# EAGLE board Bluetooth_Mate_4.0-Panel (EAGLE 9.0.1), part 1 of 2
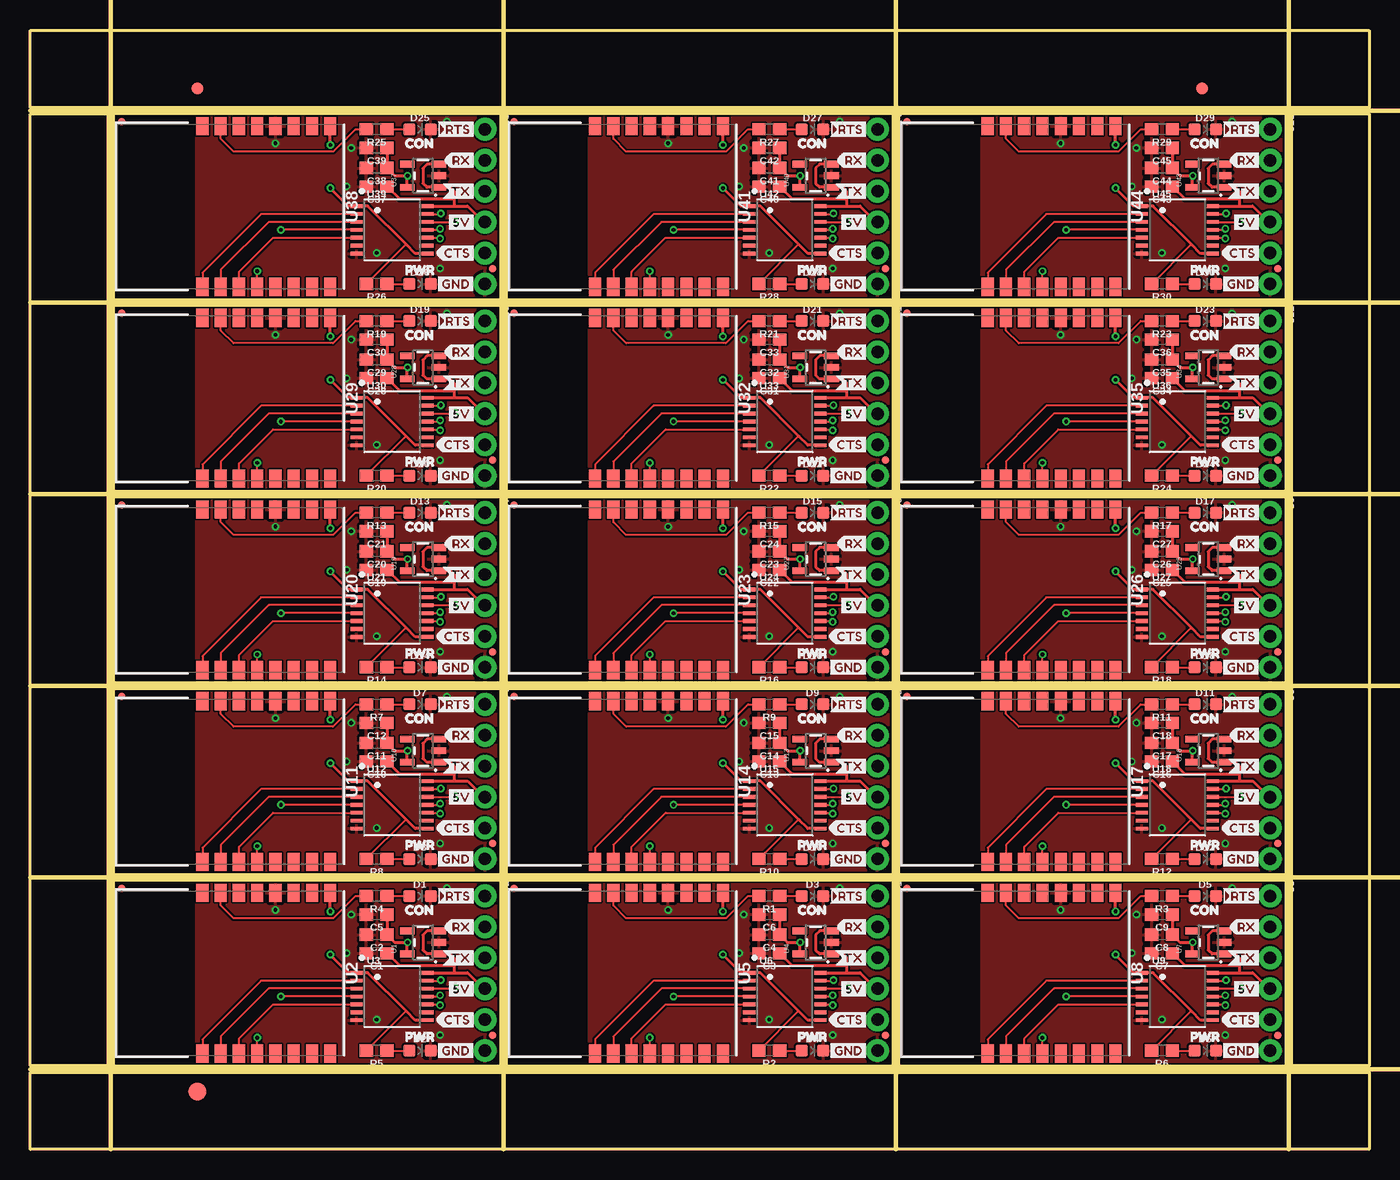
[diagram p0: board, top side]
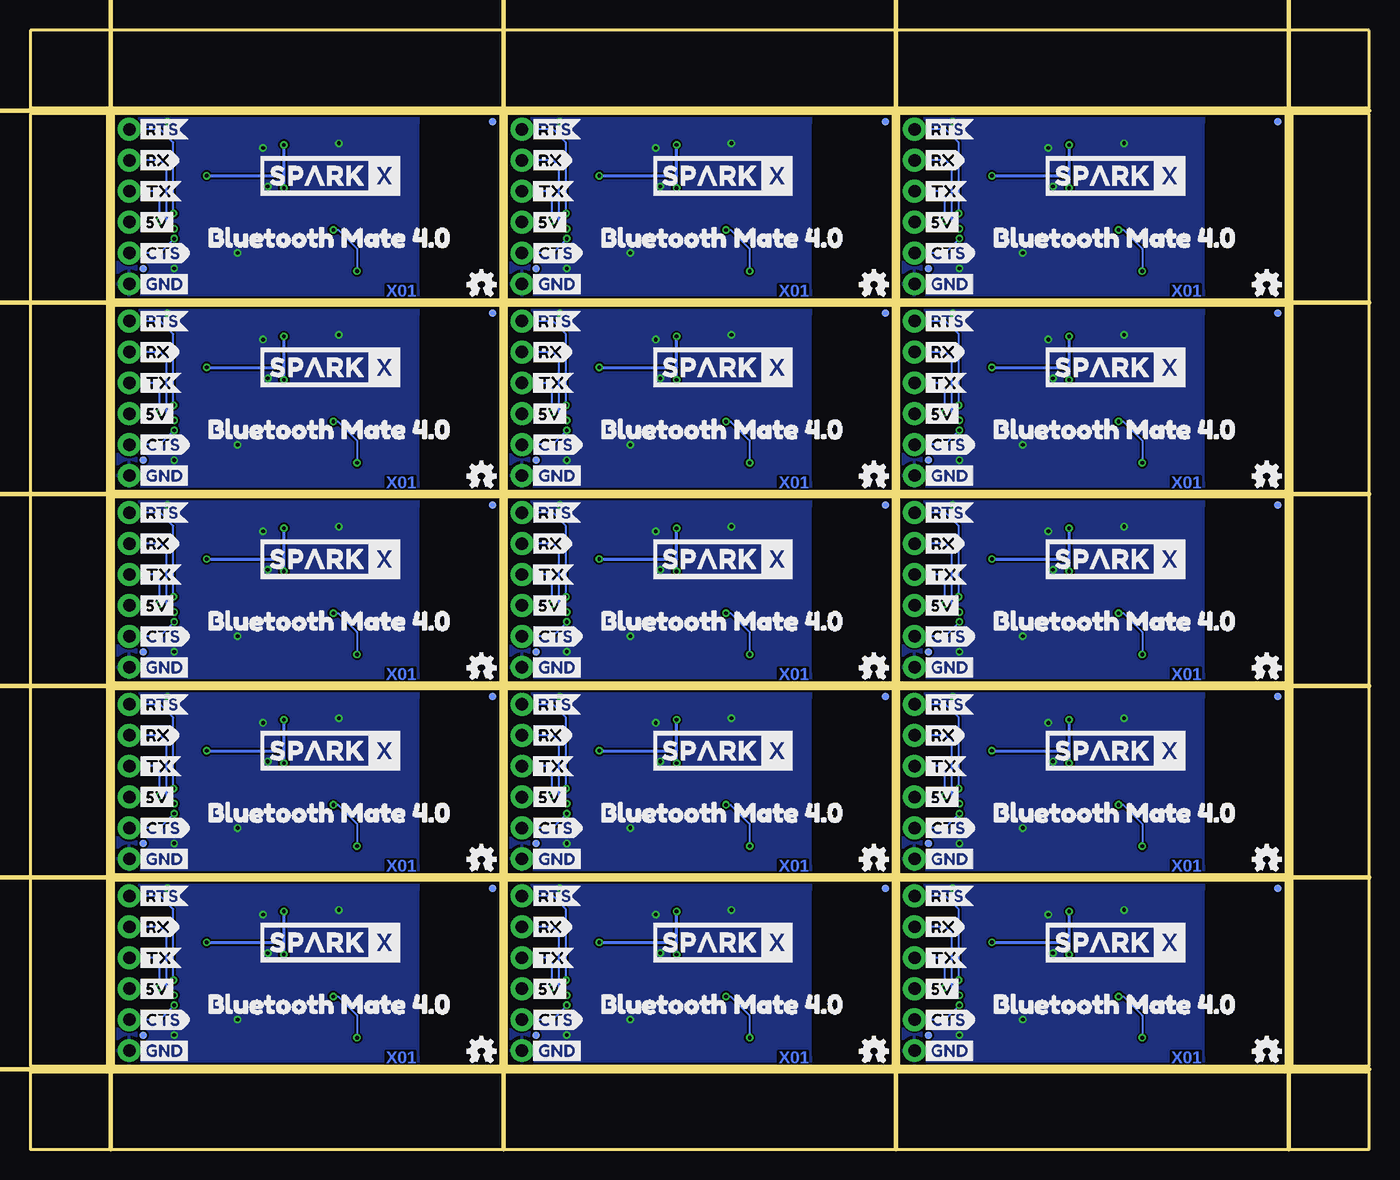
[diagram p1: board, bottom side, seen from below]

Size 109.98 x 91.95 mm. Coordinates in mm from the lower left corner, seen from the top.
Outline: 6.86,6.86 38.61,6.86 38.61,22.1 6.86,22.1 6.86,6.86
Outline: 39.12,6.86 70.87,6.86 70.87,22.1 39.12,22.1 39.12,6.86
Outline: 71.37,6.86 103.12,6.86 103.12,22.1 71.37,22.1 71.37,6.86
Outline: 6.86,22.61 38.61,22.61 38.61,37.85 6.86,37.85 6.86,22.61
Outline: 39.12,22.61 70.87,22.61 70.87,37.85 39.12,37.85 39.12,22.61
Outline: 71.37,22.61 103.12,22.61 103.12,37.85 71.37,37.85 71.37,22.61
Outline: 6.86,38.35 38.61,38.35 38.61,53.59 6.86,53.59 6.86,38.35
Outline: 39.12,38.35 70.87,38.35 70.87,53.59 39.12,53.59 39.12,38.35
Outline: 71.37,38.35 103.12,38.35 103.12,53.59 71.37,53.59 71.37,38.35
Outline: 6.86,54.1 38.61,54.1 38.61,69.34 6.86,69.34 6.86,54.1
Outline: 39.12,54.1 70.87,54.1 70.87,69.34 39.12,69.34 39.12,54.1
Outline: 71.37,54.1 103.12,54.1 103.12,69.34 71.37,69.34 71.37,54.1
Outline: 6.86,69.85 38.61,69.85 38.61,85.09 6.86,85.09 6.86,69.85
Outline: 39.12,69.85 70.87,69.85 70.87,85.09 39.12,85.09 39.12,69.85
Outline: 71.37,69.85 103.12,69.85 103.12,85.09 71.37,85.09 71.37,69.85
Outline: 0,6.35 109.98,6.35 109.98,0 0,0 0,6.35
Outline: 103.63,85.09 109.98,85.09 109.98,6.86 103.63,6.86 103.63,85.09
Outline: 0,91.95 109.98,91.95 109.98,85.6 0,85.6 0,91.95
Outline: 0,85.09 6.35,85.09 6.35,6.86 0,6.86 0,85.09
Copper layers (1*16): Top 0.035mm / dielectric 1.5mm / Bottom 0.035mm
Design rules "SparkFun-2-layer-PCBWay-LIMIT": minimum track width 6mil, minimum drill 0.3mm, track to track 6mil, track to pad 6mil, pad to pad 6mil, via to via 6mil, smd to smd 6mil, copper to edge 6mil, drill to drill 6mil, minimum pad ring 6mil, minimum via ring 6mil, stop-mask expansion 4mil, vias tented up to drill 25mil, thermal gap 10mil
Milling: 10 lines

## Footprints (pad centres in the part's own frame; a part is rotated, then mirrored left to right if it is on the bottom)
0603 = smd 1.1 x 1: 1 -0.85,0; 2 0.85,0
LED-0603 = smd 1 x 1: A -0.877,0; C 0.877,0
FIDUCIAL-1X2 = smd 1 x 1: 1 0,0
FIDUCIAL-1.5X3 = smd 1.5 x 1.5: 1 0,0
FIDUCIAL-MICRO = smd 0.635 x 0.635: 1 0,0
1X06_NO_SILK = drill 1.016 pad 1.88: 1 0,0; 2 2.54,0; 3 5.08,0; 4 7.62,0; 5 10.16,0; 6 12.7,0
SOT23-5 = smd 0.55 x 1.2: 1 -0.95,-1.3; 2 0,-1.3; 3 0.95,-1.3; 4 0.95,1.3; 5 -0.95,1.3
HM-11 = smd 1.5 x 1: 1 -6.6,2.25; 2 -6.6,0.75; 3 -6.6,-0.75; 4 -6.6,-2.25; 5 -6.6,-3.75; 6 -6.6,-5.25; 7 -6.6,-6.75; 8 -6.6,-8.25; 9 6.6,-8.25; 10 6.6,-6.75; 11 6.6,-5.25; 12 6.6,-3.75; 13 6.6,-2.25; 14 6.6,-0.75; 15 6.6,0.75; 16 6.6,2.25
TSSOP14 = smd 0.305 x 0.991: 1 -1.95,-2.918; 2 -1.3,-2.918; 3 -0.65,-2.918; 4 0,-2.918; 5 0.65,-2.918; 6 1.3,-2.918; 7 1.95,-2.918; 8 1.95,2.918; 9 1.3,2.918; 10 0.65,2.918; 11 0,2.918; 12 -0.65,2.918; 13 -1.3,2.918; 14 -1.95,2.918

## Placement (x,y rotation side)
C1  1.0uF  [0603]  28.45,16.13 180 top
C2  0.1uF  [0603]  28.45,17.65 180 top
C3  1.0uF  [0603]  60.71,16.13 180 top
C4  0.1uF  [0603]  60.71,17.65 180 top
C5  1.0uF  [0603]  28.45,19.3 180 top
C6  1.0uF  [0603]  60.71,19.3 180 top
C7  1.0uF  [0603]  92.96,16.13 180 top
C8  0.1uF  [0603]  92.96,17.65 180 top
C9  1.0uF  [0603]  92.96,19.3 180 top
C10  1.0uF  [0603]  28.45,31.88 180 top
C11  0.1uF  [0603]  28.45,33.4 180 top
C12  1.0uF  [0603]  28.45,35.05 180 top
C13  1.0uF  [0603]  60.71,31.88 180 top
C14  0.1uF  [0603]  60.71,33.4 180 top
C15  1.0uF  [0603]  60.71,35.05 180 top
C16  1.0uF  [0603]  92.96,31.88 180 top
C17  0.1uF  [0603]  92.96,33.4 180 top
C18  1.0uF  [0603]  92.96,35.05 180 top
C19  1.0uF  [0603]  28.45,47.62 180 top
C20  0.1uF  [0603]  28.45,49.15 180 top
C21  1.0uF  [0603]  28.45,50.8 180 top
C22  1.0uF  [0603]  60.71,47.62 180 top
C23  0.1uF  [0603]  60.71,49.15 180 top
C24  1.0uF  [0603]  60.71,50.8 180 top
C25  1.0uF  [0603]  92.96,47.62 180 top
C26  0.1uF  [0603]  92.96,49.15 180 top
C27  1.0uF  [0603]  92.96,50.8 180 top
C28  1.0uF  [0603]  28.45,63.37 180 top
C29  0.1uF  [0603]  28.45,64.9 180 top
C30  1.0uF  [0603]  28.45,66.55 180 top
C31  1.0uF  [0603]  60.71,63.37 180 top
C32  0.1uF  [0603]  60.71,64.9 180 top
C33  1.0uF  [0603]  60.71,66.55 180 top
C34  1.0uF  [0603]  92.96,63.37 180 top
C35  0.1uF  [0603]  92.96,64.9 180 top
C36  1.0uF  [0603]  92.96,66.55 180 top
C37  1.0uF  [0603]  28.45,79.12 180 top
C38  0.1uF  [0603]  28.45,80.65 180 top
C39  1.0uF  [0603]  28.45,82.3 180 top
C40  1.0uF  [0603]  60.71,79.12 180 top
C41  0.1uF  [0603]  60.71,80.65 180 top
C42  1.0uF  [0603]  60.71,82.3 180 top
C43  1.0uF  [0603]  92.96,79.12 180 top
C44  0.1uF  [0603]  92.96,80.65 180 top
C45  1.0uF  [0603]  92.96,82.3 180 top
D1  GREEN  [LED-0603]  32,20.83 0 top
D2  RED  [LED-0603]  32,8.13 0 top
D3  GREEN  [LED-0603]  64.26,20.83 0 top
D4  RED  [LED-0603]  64.26,8.13 0 top
D5  GREEN  [LED-0603]  96.52,20.83 0 top
D6  RED  [LED-0603]  96.52,8.13 0 top
D7  GREEN  [LED-0603]  32,36.58 0 top
D8  RED  [LED-0603]  32,23.88 0 top
D9  GREEN  [LED-0603]  64.26,36.58 0 top
D10  RED  [LED-0603]  64.26,23.88 0 top
D11  GREEN  [LED-0603]  96.52,36.58 0 top
D12  RED  [LED-0603]  96.52,23.88 0 top
D13  GREEN  [LED-0603]  32,52.32 0 top
D14  RED  [LED-0603]  32,39.62 0 top
D15  GREEN  [LED-0603]  64.26,52.32 0 top
D16  RED  [LED-0603]  64.26,39.62 0 top
D17  GREEN  [LED-0603]  96.52,52.32 0 top
D18  RED  [LED-0603]  96.52,39.62 0 top
D19  GREEN  [LED-0603]  32,68.07 0 top
D20  RED  [LED-0603]  32,55.37 0 top
D21  GREEN  [LED-0603]  64.26,68.07 0 top
D22  RED  [LED-0603]  64.26,55.37 0 top
D23  GREEN  [LED-0603]  96.52,68.07 0 top
D24  RED  [LED-0603]  96.52,55.37 0 top
D25  GREEN  [LED-0603]  32,83.82 0 top
D26  RED  [LED-0603]  32,71.12 0 top
D27  GREEN  [LED-0603]  64.26,83.82 0 top
D28  RED  [LED-0603]  64.26,71.12 0 top
D29  GREEN  [LED-0603]  96.52,83.82 0 top
D30  RED  [LED-0603]  96.52,71.12 0 top
E$1  [FIDUCIAL-1X2]  13.72,87.19 0 top
E$2  [FIDUCIAL-1X2]  96.27,87.19 0 top
E$3  [FIDUCIAL-1.5X3]  13.72,4.76 0 top
FD1  FIDUCIALUFIDUCIAL  [FIDUCIAL-MICRO]  7.49,21.46 0 top
FD2  FIDUCIALUFIDUCIAL  [FIDUCIAL-MICRO]  37.97,9.4 0 top
FD3  FIDUCIALUFIDUCIAL  [FIDUCIAL-MICRO]  36.2,9.4 0 bottom
FD4  FIDUCIALUFIDUCIAL  [FIDUCIAL-MICRO]  7.49,21.46 0 bottom
FD5  FIDUCIALUFIDUCIAL  [FIDUCIAL-MICRO]  39.75,21.46 0 top
FD6  FIDUCIALUFIDUCIAL  [FIDUCIAL-MICRO]  70.23,9.4 0 top
FD7  FIDUCIALUFIDUCIAL  [FIDUCIAL-MICRO]  68.45,9.4 0 bottom
FD8  FIDUCIALUFIDUCIAL  [FIDUCIAL-MICRO]  39.75,21.46 0 bottom
FD9  FIDUCIALUFIDUCIAL  [FIDUCIAL-MICRO]  72.01,21.46 0 top
FD10  FIDUCIALUFIDUCIAL  [FIDUCIAL-MICRO]  102.49,9.4 0 top
FD11  FIDUCIALUFIDUCIAL  [FIDUCIAL-MICRO]  100.71,9.4 0 bottom
FD12  FIDUCIALUFIDUCIAL  [FIDUCIAL-MICRO]  72.01,21.46 0 bottom
FD13  FIDUCIALUFIDUCIAL  [FIDUCIAL-MICRO]  7.49,37.21 0 top
FD14  FIDUCIALUFIDUCIAL  [FIDUCIAL-MICRO]  37.97,25.15 0 top
FD15  FIDUCIALUFIDUCIAL  [FIDUCIAL-MICRO]  36.2,25.15 0 bottom
FD16  FIDUCIALUFIDUCIAL  [FIDUCIAL-MICRO]  7.49,37.21 0 bottom
FD17  FIDUCIALUFIDUCIAL  [FIDUCIAL-MICRO]  39.75,37.21 0 top
FD18  FIDUCIALUFIDUCIAL  [FIDUCIAL-MICRO]  70.23,25.15 0 top
FD19  FIDUCIALUFIDUCIAL  [FIDUCIAL-MICRO]  68.45,25.15 0 bottom
FD20  FIDUCIALUFIDUCIAL  [FIDUCIAL-MICRO]  39.75,37.21 0 bottom
FD21  FIDUCIALUFIDUCIAL  [FIDUCIAL-MICRO]  72.01,37.21 0 top
FD22  FIDUCIALUFIDUCIAL  [FIDUCIAL-MICRO]  102.49,25.15 0 top
FD23  FIDUCIALUFIDUCIAL  [FIDUCIAL-MICRO]  100.71,25.15 0 bottom
FD24  FIDUCIALUFIDUCIAL  [FIDUCIAL-MICRO]  72.01,37.21 0 bottom
FD25  FIDUCIALUFIDUCIAL  [FIDUCIAL-MICRO]  7.49,52.96 0 top
FD26  FIDUCIALUFIDUCIAL  [FIDUCIAL-MICRO]  37.97,40.89 0 top
FD27  FIDUCIALUFIDUCIAL  [FIDUCIAL-MICRO]  36.2,40.89 0 bottom
FD28  FIDUCIALUFIDUCIAL  [FIDUCIAL-MICRO]  7.49,52.96 0 bottom
FD29  FIDUCIALUFIDUCIAL  [FIDUCIAL-MICRO]  39.75,52.96 0 top
FD30  FIDUCIALUFIDUCIAL  [FIDUCIAL-MICRO]  70.23,40.89 0 top
FD31  FIDUCIALUFIDUCIAL  [FIDUCIAL-MICRO]  68.45,40.89 0 bottom
FD32  FIDUCIALUFIDUCIAL  [FIDUCIAL-MICRO]  39.75,52.96 0 bottom
FD33  FIDUCIALUFIDUCIAL  [FIDUCIAL-MICRO]  72.01,52.96 0 top
FD34  FIDUCIALUFIDUCIAL  [FIDUCIAL-MICRO]  102.49,40.89 0 top
FD35  FIDUCIALUFIDUCIAL  [FIDUCIAL-MICRO]  100.71,40.89 0 bottom
FD36  FIDUCIALUFIDUCIAL  [FIDUCIAL-MICRO]  72.01,52.96 0 bottom
FD37  FIDUCIALUFIDUCIAL  [FIDUCIAL-MICRO]  7.49,68.71 0 top
FD38  FIDUCIALUFIDUCIAL  [FIDUCIAL-MICRO]  37.97,56.64 0 top
FD39  FIDUCIALUFIDUCIAL  [FIDUCIAL-MICRO]  36.2,56.64 0 bottom
FD40  FIDUCIALUFIDUCIAL  [FIDUCIAL-MICRO]  7.49,68.71 0 bottom
FD41  FIDUCIALUFIDUCIAL  [FIDUCIAL-MICRO]  39.75,68.71 0 top
FD42  FIDUCIALUFIDUCIAL  [FIDUCIAL-MICRO]  70.23,56.64 0 top
FD43  FIDUCIALUFIDUCIAL  [FIDUCIAL-MICRO]  68.45,56.64 0 bottom
FD44  FIDUCIALUFIDUCIAL  [FIDUCIAL-MICRO]  39.75,68.71 0 bottom
FD45  FIDUCIALUFIDUCIAL  [FIDUCIAL-MICRO]  72.01,68.71 0 top
FD46  FIDUCIALUFIDUCIAL  [FIDUCIAL-MICRO]  102.49,56.64 0 top
FD47  FIDUCIALUFIDUCIAL  [FIDUCIAL-MICRO]  100.71,56.64 0 bottom
FD48  FIDUCIALUFIDUCIAL  [FIDUCIAL-MICRO]  72.01,68.71 0 bottom
FD49  FIDUCIALUFIDUCIAL  [FIDUCIAL-MICRO]  7.49,84.45 0 top
FD50  FIDUCIALUFIDUCIAL  [FIDUCIAL-MICRO]  37.97,72.39 0 top
FD51  FIDUCIALUFIDUCIAL  [FIDUCIAL-MICRO]  36.2,72.39 0 bottom
FD52  FIDUCIALUFIDUCIAL  [FIDUCIAL-MICRO]  7.49,84.45 0 bottom
FD53  FIDUCIALUFIDUCIAL  [FIDUCIAL-MICRO]  39.75,84.45 0 top
FD54  FIDUCIALUFIDUCIAL  [FIDUCIAL-MICRO]  70.23,72.39 0 top
FD55  FIDUCIALUFIDUCIAL  [FIDUCIAL-MICRO]  68.45,72.39 0 bottom
FD56  FIDUCIALUFIDUCIAL  [FIDUCIAL-MICRO]  39.75,84.45 0 bottom
FD57  FIDUCIALUFIDUCIAL  [FIDUCIAL-MICRO]  72.01,84.45 0 top
FD58  FIDUCIALUFIDUCIAL  [FIDUCIAL-MICRO]  102.49,72.39 0 top
FD59  FIDUCIALUFIDUCIAL  [FIDUCIAL-MICRO]  100.71,72.39 0 bottom
FD60  FIDUCIALUFIDUCIAL  [FIDUCIAL-MICRO]  72.01,84.45 0 bottom
J1  [1X06_NO_SILK]  69.6,20.83 270 top
J2  [1X06_NO_SILK]  37.34,20.83 270 top
J3  [1X06_NO_SILK]  101.85,20.83 270 top
J4  [1X06_NO_SILK]  37.34,36.58 270 top
J5  [1X06_NO_SILK]  69.6,36.58 270 top
J6  [1X06_NO_SILK]  101.85,36.58 270 top
J7  [1X06_NO_SILK]  37.34,52.32 270 top
J8  [1X06_NO_SILK]  69.6,52.32 270 top
J9  [1X06_NO_SILK]  101.85,52.32 270 top
J10  [1X06_NO_SILK]  37.34,68.07 270 top
J11  [1X06_NO_SILK]  69.6,68.07 270 top
J12  [1X06_NO_SILK]  101.85,68.07 270 top
J13  [1X06_NO_SILK]  37.34,83.82 270 top
J14  [1X06_NO_SILK]  69.6,83.82 270 top
J15  [1X06_NO_SILK]  101.85,83.82 270 top
LOGO1  OSHW-LOGOMINI  [OSHW-LOGO-MINI]  8.41,8.1 0 bottom
LOGO2  OSHW-LOGOMINI  [OSHW-LOGO-MINI]  40.67,8.1 0 bottom
LOGO3  SPARKX-LOGO5  [SPARKX-LARGE]  20.83,17.02 0 bottom
LOGO4  SPARKX-LOGO5  [SPARKX-LARGE]  53.09,17.02 0 bottom
LOGO5  OSHW-LOGOMINI  [OSHW-LOGO-MINI]  72.93,8.1 0 bottom
LOGO6  SPARKX-LOGO5  [SPARKX-LARGE]  85.34,17.02 0 bottom
LOGO7  OSHW-LOGOMINI  [OSHW-LOGO-MINI]  8.41,23.84 0 bottom
LOGO8  SPARKX-LOGO5  [SPARKX-LARGE]  20.83,32.77 0 bottom
LOGO9  OSHW-LOGOMINI  [OSHW-LOGO-MINI]  40.67,23.84 0 bottom
LOGO10  SPARKX-LOGO5  [SPARKX-LARGE]  53.09,32.77 0 bottom
LOGO11  OSHW-LOGOMINI  [OSHW-LOGO-MINI]  72.93,23.84 0 bottom
LOGO12  SPARKX-LOGO5  [SPARKX-LARGE]  85.34,32.77 0 bottom
LOGO13  OSHW-LOGOMINI  [OSHW-LOGO-MINI]  8.41,39.59 0 bottom
LOGO14  SPARKX-LOGO5  [SPARKX-LARGE]  20.83,48.51 0 bottom
LOGO15  OSHW-LOGOMINI  [OSHW-LOGO-MINI]  40.67,39.59 0 bottom
LOGO16  SPARKX-LOGO5  [SPARKX-LARGE]  53.09,48.51 0 bottom
LOGO17  OSHW-LOGOMINI  [OSHW-LOGO-MINI]  72.93,39.59 0 bottom
LOGO18  SPARKX-LOGO5  [SPARKX-LARGE]  85.34,48.51 0 bottom
LOGO19  OSHW-LOGOMINI  [OSHW-LOGO-MINI]  8.41,55.34 0 bottom
LOGO20  SPARKX-LOGO5  [SPARKX-LARGE]  20.83,64.26 0 bottom
LOGO21  OSHW-LOGOMINI  [OSHW-LOGO-MINI]  40.67,55.34 0 bottom
LOGO22  SPARKX-LOGO5  [SPARKX-LARGE]  53.09,64.26 0 bottom
LOGO23  OSHW-LOGOMINI  [OSHW-LOGO-MINI]  72.93,55.34 0 bottom
LOGO24  SPARKX-LOGO5  [SPARKX-LARGE]  85.34,64.26 0 bottom
LOGO25  OSHW-LOGOMINI  [OSHW-LOGO-MINI]  8.41,71.09 0 bottom
LOGO26  SPARKX-LOGO5  [SPARKX-LARGE]  20.83,80.01 0 bottom
LOGO27  OSHW-LOGOMINI  [OSHW-LOGO-MINI]  40.67,71.09 0 bottom
LOGO28  SPARKX-LOGO5  [SPARKX-LARGE]  53.09,80.01 0 bottom
LOGO29  OSHW-LOGOMINI  [OSHW-LOGO-MINI]  72.93,71.09 0 bottom
LOGO30  SPARKX-LOGO5  [SPARKX-LARGE]  85.34,80.01 0 bottom
R1  330  [0603]  60.71,20.83 180 top
R2  1k  [0603]  60.71,8.13 180 top
R3  330  [0603]  92.96,20.83 180 top
R4  330  [0603]  28.45,20.83 180 top
R5  1k  [0603]  28.45,8.13 180 top
R6  1k  [0603]  92.96,8.13 180 top
R7  330  [0603]  28.45,36.58 180 top
R8  1k  [0603]  28.45,23.88 180 top
R9  330  [0603]  60.71,36.58 180 top
R10  1k  [0603]  60.71,23.88 180 top
R11  330  [0603]  92.96,36.58 180 top
R12  1k  [0603]  92.96,23.88 180 top
R13  330  [0603]  28.45,52.32 180 top
R14  1k  [0603]  28.45,39.62 180 top
R15  330  [0603]  60.71,52.32 180 top
R16  1k  [0603]  60.71,39.62 180 top
R17  330  [0603]  92.96,52.32 180 top
R18  1k  [0603]  92.96,39.62 180 top
R19  330  [0603]  28.45,68.07 180 top
R20  1k  [0603]  28.45,55.37 180 top
R21  330  [0603]  60.71,68.07 180 top
R22  1k  [0603]  60.71,55.37 180 top
R23  330  [0603]  92.96,68.07 180 top
R24  1k  [0603]  92.96,55.37 180 top
R25  330  [0603]  28.45,83.82 180 top
R26  1k  [0603]  28.45,71.12 180 top
R27  330  [0603]  60.71,83.82 180 top
R28  1k  [0603]  60.71,71.12 180 top
R29  330  [0603]  92.96,83.82 180 top
R30  1k  [0603]  92.96,71.12 180 top
U1  3.3V  [SOT23-5]  32.26,17.02 90 top
U2  HM-17  [HM-11]  16.38,14.48 90 top
U3  TXB0104  [TSSOP14]  29.72,12.57 270 top
U4  3.3V  [SOT23-5]  64.52,17.02 90 top
U5  HM-17  [HM-11]  48.64,14.48 90 top
U6  TXB0104  [TSSOP14]  61.98,12.57 270 top
U7  3.3V  [SOT23-5]  96.77,17.02 90 top
U8  HM-17  [HM-11]  80.9,14.48 90 top
U9  TXB0104  [TSSOP14]  94.23,12.57 270 top
U10  3.3V  [SOT23-5]  32.26,32.77 90 top
U11  HM-17  [HM-11]  16.38,30.23 90 top
U12  TXB0104  [TSSOP14]  29.72,28.32 270 top
U13  3.3V  [SOT23-5]  64.52,32.77 90 top
U14  HM-17  [HM-11]  48.64,30.23 90 top
U15  TXB0104  [TSSOP14]  61.98,28.32 270 top
U16  3.3V  [SOT23-5]  96.77,32.77 90 top
U17  HM-17  [HM-11]  80.9,30.23 90 top
U18  TXB0104  [TSSOP14]  94.23,28.32 270 top
U19  3.3V  [SOT23-5]  32.26,48.51 90 top
U20  HM-17  [HM-11]  16.38,45.97 90 top
U21  TXB0104  [TSSOP14]  29.72,44.07 270 top
U22  3.3V  [SOT23-5]  64.52,48.51 90 top
U23  HM-17  [HM-11]  48.64,45.97 90 top
U24  TXB0104  [TSSOP14]  61.98,44.07 270 top
U25  3.3V  [SOT23-5]  96.77,48.51 90 top
U26  HM-17  [HM-11]  80.9,45.97 90 top
U27  TXB0104  [TSSOP14]  94.23,44.07 270 top
U28  3.3V  [SOT23-5]  32.26,64.26 90 top
U29  HM-17  [HM-11]  16.38,61.72 90 top
U30  TXB0104  [TSSOP14]  29.72,59.82 270 top
U31  3.3V  [SOT23-5]  64.52,64.26 90 top
U32  HM-17  [HM-11]  48.64,61.72 90 top
U33  TXB0104  [TSSOP14]  61.98,59.82 270 top
U34  3.3V  [SOT23-5]  96.77,64.26 90 top
U35  HM-17  [HM-11]  80.9,61.72 90 top
U36  TXB0104  [TSSOP14]  94.23,59.82 270 top
U37  3.3V  [SOT23-5]  32.26,80.01 90 top
U38  HM-17  [HM-11]  16.38,77.47 90 top
U39  TXB0104  [TSSOP14]  29.72,75.56 270 top
U40  3.3V  [SOT23-5]  64.52,80.01 90 top
U41  HM-17  [HM-11]  48.64,77.47 90 top
U42  TXB0104  [TSSOP14]  61.98,75.56 270 top
U43  3.3V  [SOT23-5]  96.77,80.01 90 top
U44  HM-17  [HM-11]  80.9,77.47 90 top
U45  TXB0104  [TSSOP14]  94.23,75.56 270 top
U$1  [CTS13]  33.27,10.67 0 top
U$2  [5V9]  34,13.21 0 top
U$3  [GND8]  33.12,8.13 0 top
U$4  [RX10]  33.94,18.29 0 top
U$5  [TX9]  33.85,15.75 0 top
U$6  [RTS12]  33.4,20.83 0 top
U$7  [RTS13]  36.93,20.83 0 bottom
U$8  [TX11]  36.89,15.75 0 bottom
U$9  [RX9]  36.93,18.29 0 bottom
U$10  [5V6]  36.93,13.21 0 bottom
U$11  [CTS8]  36.93,10.67 0 bottom
U$12  [GND13]  36.89,8.13 0 bottom
U$13  [BLUETOOTH_MATE_4#06]  32.26,11.94 0 bottom
U$14  [PWR6]  30.1,9.27 0 top
U$15  [CON7]  30.1,19.68 0 top
U$16  [BLUETOOTH_MATE_4#06]  64.52,11.94 0 bottom
U$17  [PWR6]  62.36,9.27 0 top
U$18  [CON7]  62.36,19.68 0 top
U$19  [5V9]  66.26,13.21 0 top
U$20  [CTS13]  65.53,10.67 0 top
U$21  [GND8]  65.37,8.13 0 top
U$22  [RX10]  66.2,18.29 0 top
U$23  [RTS12]  65.66,20.83 0 top
U$24  [RTS13]  69.18,20.83 0 bottom
U$25  [TX11]  69.15,15.75 0 bottom
U$26  [RX9]  69.18,18.29 0 bottom
U$27  [5V6]  69.18,13.21 0 bottom
U$28  [CTS8]  69.18,10.67 0 bottom
U$29  [GND13]  69.15,8.13 0 bottom
U$30  [TX9]  66.1,15.75 0 top
U$31  [BLUETOOTH_MATE_4#06]  96.77,11.94 0 bottom
U$32  [PWR6]  94.62,9.27 0 top
U$33  [CON7]  94.62,19.68 0 top
U$34  [5V9]  98.52,13.21 0 top
U$35  [CTS13]  97.79,10.67 0 top
U$36  [GND8]  97.63,8.13 0 top
U$37  [RX10]  98.46,18.29 0 top
U$38  [RTS12]  97.92,20.83 0 top
U$39  [RTS13]  101.44,20.83 0 bottom
U$40  [TX11]  101.41,15.75 0 bottom
U$41  [RX9]  101.44,18.29 0 bottom
U$42  [5V6]  101.44,13.21 0 bottom
U$43  [CTS8]  101.44,10.67 0 bottom
U$44  [GND13]  101.41,8.13 0 bottom
U$45  [TX9]  98.36,15.75 0 top
U$46  [BLUETOOTH_MATE_4#06]  32.26,27.69 0 bottom
U$47  [PWR6]  30.1,25.02 0 top
U$48  [CON7]  30.1,35.43 0 top
U$49  [5V9]  34,28.96 0 top
U$50  [CTS13]  33.27,26.42 0 top
U$51  [GND8]  33.12,23.88 0 top
U$52  [RX10]  33.94,34.04 0 top
U$53  [RTS12]  33.4,36.58 0 top
U$54  [RTS13]  36.93,36.58 0 bottom
U$55  [TX11]  36.89,31.5 0 bottom
U$56  [RX9]  36.93,34.04 0 bottom
U$57  [5V6]  36.93,28.96 0 bottom
U$58  [CTS8]  36.93,26.42 0 bottom
U$59  [GND13]  36.89,23.88 0 bottom
U$60  [TX9]  33.85,31.5 0 top
U$61  [BLUETOOTH_MATE_4#06]  64.52,27.69 0 bottom
U$62  [PWR6]  62.36,25.02 0 top
U$63  [CON7]  62.36,35.43 0 top
U$64  [5V9]  66.26,28.96 0 top
U$65  [CTS13]  65.53,26.42 0 top
U$66  [GND8]  65.37,23.88 0 top
U$67  [RX10]  66.2,34.04 0 top
U$68  [RTS12]  65.66,36.58 0 top
U$69  [RTS13]  69.18,36.58 0 bottom
U$70  [TX11]  69.15,31.5 0 bottom
U$71  [RX9]  69.18,34.04 0 bottom
U$72  [5V6]  69.18,28.96 0 bottom
U$73  [CTS8]  69.18,26.42 0 bottom
U$74  [GND13]  69.15,23.88 0 bottom
U$75  [TX9]  66.1,31.5 0 top
U$76  [BLUETOOTH_MATE_4#06]  96.77,27.69 0 bottom
U$77  [PWR6]  94.62,25.02 0 top
U$78  [CON7]  94.62,35.43 0 top
U$79  [5V9]  98.52,28.96 0 top
U$80  [CTS13]  97.79,26.42 0 top
U$81  [GND8]  97.63,23.88 0 top
U$82  [RX10]  98.46,34.04 0 top
U$83  [RTS12]  97.92,36.58 0 top
U$84  [RTS13]  101.44,36.58 0 bottom
U$85  [TX11]  101.41,31.5 0 bottom
U$86  [RX9]  101.44,34.04 0 bottom
U$87  [5V6]  101.44,28.96 0 bottom
U$88  [CTS8]  101.44,26.42 0 bottom
U$89  [GND13]  101.41,23.88 0 bottom
U$90  [TX9]  98.36,31.5 0 top
U$91  [BLUETOOTH_MATE_4#06]  32.26,43.43 0 bottom
U$92  [PWR6]  30.1,40.77 0 top
U$93  [CON7]  30.1,51.18 0 top
U$94  [5V9]  34,44.7 0 top
U$95  [CTS13]  33.27,42.16 0 top
U$96  [GND8]  33.12,39.62 0 top
U$97  [RX10]  33.94,49.78 0 top
U$98  [RTS12]  33.4,52.32 0 top
U$99  [RTS13]  36.93,52.32 0 bottom
U$100  [TX11]  36.89,47.24 0 bottom
U$101  [RX9]  36.93,49.78 0 bottom
U$102  [5V6]  36.93,44.7 0 bottom
U$103  [CTS8]  36.93,42.16 0 bottom
U$104  [GND13]  36.89,39.62 0 bottom
U$105  [TX9]  33.85,47.24 0 top
U$106  [BLUETOOTH_MATE_4#06]  64.52,43.43 0 bottom
U$107  [PWR6]  62.36,40.77 0 top
U$108  [CON7]  62.36,51.18 0 top
U$109  [5V9]  66.26,44.7 0 top
U$110  [CTS13]  65.53,42.16 0 top
U$111  [GND8]  65.37,39.62 0 top
U$112  [RX10]  66.2,49.78 0 top
U$113  [RTS12]  65.66,52.32 0 top
U$114  [RTS13]  69.18,52.32 0 bottom
U$115  [TX11]  69.15,47.24 0 bottom
U$116  [RX9]  69.18,49.78 0 bottom
U$117  [5V6]  69.18,44.7 0 bottom
U$118  [CTS8]  69.18,42.16 0 bottom
U$119  [GND13]  69.15,39.62 0 bottom
U$120  [TX9]  66.1,47.24 0 top
U$121  [BLUETOOTH_MATE_4#06]  96.77,43.43 0 bottom
U$122  [PWR6]  94.62,40.77 0 top
U$123  [CON7]  94.62,51.18 0 top
U$124  [5V9]  98.52,44.7 0 top
U$125  [CTS13]  97.79,42.16 0 top
U$126  [GND8]  97.63,39.62 0 top
U$127  [RX10]  98.46,49.78 0 top
U$128  [RTS12]  97.92,52.32 0 top
U$129  [RTS13]  101.44,52.32 0 bottom
U$130  [TX11]  101.41,47.24 0 bottom
U$131  [RX9]  101.44,49.78 0 bottom
U$132  [5V6]  101.44,44.7 0 bottom
U$133  [CTS8]  101.44,42.16 0 bottom
U$134  [GND13]  101.41,39.62 0 bottom
U$135  [TX9]  98.36,47.24 0 top
U$136  [BLUETOOTH_MATE_4#06]  32.26,59.18 0 bottom
U$137  [PWR6]  30.1,56.51 0 top
U$138  [CON7]  30.1,66.93 0 top
U$139  [5V9]  34,60.45 0 top
U$140  [CTS13]  33.27,57.91 0 top
U$141  [GND8]  33.12,55.37 0 top
U$142  [RX10]  33.94,65.53 0 top
U$143  [RTS12]  33.4,68.07 0 top
U$144  [RTS13]  36.93,68.07 0 bottom
U$145  [TX11]  36.89,62.99 0 bottom
U$146  [RX9]  36.93,65.53 0 bottom
U$147  [5V6]  36.93,60.45 0 bottom
U$148  [CTS8]  36.93,57.91 0 bottom
U$149  [GND13]  36.89,55.37 0 bottom
U$150  [TX9]  33.85,62.99 0 top
U$151  [BLUETOOTH_MATE_4#06]  64.52,59.18 0 bottom
U$152  [PWR6]  62.36,56.51 0 top
U$153  [CON7]  62.36,66.93 0 top
U$154  [5V9]  66.26,60.45 0 top
U$155  [CTS13]  65.53,57.91 0 top
U$156  [GND8]  65.37,55.37 0 top
U$157  [RX10]  66.2,65.53 0 top
U$158  [RTS12]  65.66,68.07 0 top
U$159  [RTS13]  69.18,68.07 0 bottom
U$160  [TX11]  69.15,62.99 0 bottom
U$161  [RX9]  69.18,65.53 0 bottom
U$162  [5V6]  69.18,60.45 0 bottom
U$163  [CTS8]  69.18,57.91 0 bottom
U$164  [GND13]  69.15,55.37 0 bottom
U$165  [TX9]  66.1,62.99 0 top
U$166  [BLUETOOTH_MATE_4#06]  96.77,59.18 0 bottom
U$167  [PWR6]  94.62,56.51 0 top
U$168  [CON7]  94.62,66.93 0 top
U$169  [5V9]  98.52,60.45 0 top
U$170  [CTS13]  97.79,57.91 0 top
U$171  [GND8]  97.63,55.37 0 top
U$172  [RX10]  98.46,65.53 0 top
U$173  [RTS12]  97.92,68.07 0 top
U$174  [RTS13]  101.44,68.07 0 bottom
U$175  [TX11]  101.41,62.99 0 bottom
U$176  [RX9]  101.44,65.53 0 bottom
U$177  [5V6]  101.44,60.45 0 bottom
U$178  [CTS8]  101.44,57.91 0 bottom
U$179  [GND13]  101.41,55.37 0 bottom
U$180  [TX9]  98.36,62.99 0 top
U$181  [BLUETOOTH_MATE_4#06]  32.26,74.93 0 bottom
U$182  [PWR6]  30.1,72.26 0 top
U$183  [CON7]  30.1,82.68 0 top
U$184  [5V9]  34,76.2 0 top
U$185  [CTS13]  33.27,73.66 0 top
U$186  [GND8]  33.12,71.12 0 top
U$187  [RX10]  33.94,81.28 0 top
U$188  [RTS12]  33.4,83.82 0 top
U$189  [RTS13]  36.93,83.82 0 bottom
U$190  [TX11]  36.89,78.74 0 bottom
U$191  [RX9]  36.93,81.28 0 bottom
U$192  [5V6]  36.93,76.2 0 bottom
U$193  [CTS8]  36.93,73.66 0 bottom
U$194  [GND13]  36.89,71.12 0 bottom
U$195  [TX9]  33.85,78.74 0 top
U$196  [BLUETOOTH_MATE_4#06]  64.52,74.93 0 bottom
U$197  [PWR6]  62.36,72.26 0 top
U$198  [CON7]  62.36,82.68 0 top
U$199  [5V9]  66.26,76.2 0 top
U$200  [CTS13]  65.53,73.66 0 top
U$201  [GND8]  65.37,71.12 0 top
U$202  [RX10]  66.2,81.28 0 top
U$203  [RTS12]  65.66,83.82 0 top
U$204  [RTS13]  69.18,83.82 0 bottom
U$205  [TX11]  69.15,78.74 0 bottom
U$206  [RX9]  69.18,81.28 0 bottom
U$207  [5V6]  69.18,76.2 0 bottom
U$208  [CTS8]  69.18,73.66 0 bottom
U$209  [GND13]  69.15,71.12 0 bottom
U$210  [TX9]  66.1,78.74 0 top
U$211  [BLUETOOTH_MATE_4#06]  96.77,74.93 0 bottom
U$212  [PWR6]  94.62,72.26 0 top
U$213  [CON7]  94.62,82.68 0 top
U$214  [5V9]  98.52,76.2 0 top
U$215  [CTS13]  97.79,73.66 0 top
U$216  [GND8]  97.63,71.12 0 top
U$217  [RX10]  98.46,81.28 0 top
U$218  [RTS12]  97.92,83.82 0 top
U$219  [RTS13]  101.44,83.82 0 bottom
U$220  [TX11]  101.41,78.74 0 bottom
U$221  [RX9]  101.44,81.28 0 bottom
U$222  [5V6]  101.44,76.2 0 bottom
U$223  [CTS8]  101.44,73.66 0 bottom
U$224  [GND13]  101.41,71.12 0 bottom
U$225  [TX9]  98.36,78.74 0 top

## Library data of the parts
C1 C3 C5-C7 C9 C10 C12 C13 C15 C16 C18 C19 C21 C22 C24 C25 C27 C28 C30 C31 C33 C34 C36 C37 C39 C40 C42 C43 C45 = SparkFun-Capacitors; PROD_ID: CAP-00868
C2 C4 C8 C11 C14 C17 C20 C23 C26 C29 C32 C35 C38 C41 C44 = SparkFun-Capacitors; PROD_ID: CAP-00810
D1 D3 D5 D7 D9 D11 D13 D15 D17 D19 D21 D23 D25 D27 D29 = SparkFun-LED; PROD_ID: DIO-00821
D2 D4 D6 D8 D10 D12 D14 D16 D18 D20 D22 D24 D26 D28 D30 = SparkFun-LED; PROD_ID: DIO-00819
E$1 E$2 FD1-FD60 LOGO1 LOGO2 LOGO5 LOGO7 LOGO9 LOGO11 LOGO13 LOGO15 LOGO17 LOGO19 LOGO21 LOGO23 LOGO25 LOGO27 LOGO29 = SparkFun-Aesthetics
E$3 = SparkFun-Retired
J1-J15 = SparkFun-Connectors
LOGO3 LOGO4 LOGO6 LOGO8 LOGO10 LOGO12 LOGO14 LOGO16 LOGO18 LOGO20 LOGO22 LOGO24 LOGO26 LOGO28 LOGO30 = SparkX
R1 R3 R4 R7 R9 R11 R13 R15 R17 R19 R21 R23 R25 R27 R29 = SparkFun-Resistors; PROD_ID: RES-00818
R2 R5 R6 R8 R10 R12 R14 R16 R18 R20 R22 R24 R26 R28 R30 = SparkFun-Resistors; PROD_ID: RES-07856
U1 U4 U7 U10 U13 U16 U19 U22 U25 U28 U31 U34 U37 U40 U43 = SparkFun-IC-Power; PROD_ID: VREG-12457
U2 U5 U8 U11 U14 U17 U20 U23 U26 U29 U32 U35 U38 U41 U44 = Qwiic-Bluetooth-HC1x
U3 U6 U9 U12 U15 U18 U21 U24 U27 U30 U33 U36 U39 U42 U45 = SparkFun-IC-Comms; PROD_ID: IC-13929
U$1-U$225 = buzzard_labels

## Nets
3.3V: C2.1 C5.1 R5.2 U1.5 U2.9 U3.1 U3.8
3.3V1: C4.1 C6.1 R2.2 U4.5 U5.9 U6.1 U6.8
3.3V2: C8.1 C9.1 R6.2 U7.5 U8.9 U9.1 U9.8
3.3V3: C11.1 C12.1 R8.2 U10.5 U11.9 U12.1 U12.8
3.3V4: C14.1 C15.1 R10.2 U13.5 U14.9 U15.1 U15.8
3.3V5: C17.1 C18.1 R12.2 U16.5 U17.9 U18.1 U18.8
3.3V6: C20.1 C21.1 R14.2 U19.5 U20.9 U21.1 U21.8
3.3V7: C23.1 C24.1 R16.2 U22.5 U23.9 U24.1 U24.8
3.3V8: C26.1 C27.1 R18.2 U25.5 U26.9 U27.1 U27.8
3.3V9: C29.1 C30.1 R20.2 U28.5 U29.9 U30.1 U30.8
3.3V10: C32.1 C33.1 R22.2 U31.5 U32.9 U33.1 U33.8
3.3V11: C35.1 C36.1 R24.2 U34.5 U35.9 U36.1 U36.8
3.3V12: C38.1 C39.1 R26.2 U37.5 U38.9 U39.1 U39.8
3.3V13: C41.1 C42.1 R28.2 U40.5 U41.9 U42.1 U42.8
3.3V14: C44.1 C45.1 R30.2 U43.5 U44.9 U45.1 U45.8
5V: C1.1 J2.4 U1.1 U1.3 U3.14
5V1: C3.1 J1.4 U4.1 U4.3 U6.14
5V2: C7.1 J3.4 U7.1 U7.3 U9.14
5V3: C10.1 J4.4 U10.1 U10.3 U12.14
5V4: C13.1 J5.4 U13.1 U13.3 U15.14
5V5: C16.1 J6.4 U16.1 U16.3 U18.14
5V6: C19.1 J7.4 U19.1 U19.3 U21.14
5V7: C22.1 J8.4 U22.1 U22.3 U24.14
5V8: C25.1 J9.4 U25.1 U25.3 U27.14
5V9: C28.1 J10.4 U28.1 U28.3 U30.14
5V10: C31.1 J11.4 U31.1 U31.3 U33.14
5V11: C34.1 J12.4 U34.1 U34.3 U36.14
5V12: C37.1 J13.4 U37.1 U37.3 U39.14
5V13: C40.1 J14.4 U40.1 U40.3 U42.14
5V14: C43.1 J15.4 U43.1 U43.3 U45.14
5V_BT_CTS: J2.5 U3.10
5V_BT_CTS1: J1.5 U6.10
5V_BT_CTS2: J3.5 U9.10
5V_BT_CTS3: J4.5 U12.10
5V_BT_CTS4: J5.5 U15.10
5V_BT_CTS5: J6.5 U18.10
5V_BT_CTS6: J7.5 U21.10
5V_BT_CTS7: J8.5 U24.10
5V_BT_CTS8: J9.5 U27.10
5V_BT_CTS9: J10.5 U30.10
5V_BT_CTS10: J11.5 U33.10
5V_BT_CTS11: J12.5 U36.10
5V_BT_CTS12: J13.5 U39.10
5V_BT_CTS13: J14.5 U42.10
5V_BT_CTS14: J15.5 U45.10
5V_BT_RTS: J2.1 U3.13
5V_BT_RTS1: J1.1 U6.13
5V_BT_RTS2: J3.1 U9.13
5V_BT_RTS3: J4.1 U12.13
5V_BT_RTS4: J5.1 U15.13
5V_BT_RTS5: J6.1 U18.13
5V_BT_RTS6: J7.1 U21.13
5V_BT_RTS7: J8.1 U24.13
5V_BT_RTS8: J9.1 U27.13
5V_BT_RTS9: J10.1 U30.13
5V_BT_RTS10: J11.1 U33.13
5V_BT_RTS11: J12.1 U36.13
5V_BT_RTS12: J13.1 U39.13
5V_BT_RTS13: J14.1 U42.13
5V_BT_RTS14: J15.1 U45.13
5V_BT_RX: J2.2 U3.11
5V_BT_RX1: J1.2 U6.11
5V_BT_RX2: J3.2 U9.11
5V_BT_RX3: J4.2 U12.11
5V_BT_RX4: J5.2 U15.11
5V_BT_RX5: J6.2 U18.11
5V_BT_RX6: J7.2 U21.11
5V_BT_RX7: J8.2 U24.11
5V_BT_RX8: J9.2 U27.11
5V_BT_RX9: J10.2 U30.11
5V_BT_RX10: J11.2 U33.11
5V_BT_RX11: J12.2 U36.11
5V_BT_RX12: J13.2 U39.11
5V_BT_RX13: J14.2 U42.11
5V_BT_RX14: J15.2 U45.11
5V_BT_TX: J2.3 U3.12
5V_BT_TX1: J1.3 U6.12
5V_BT_TX2: J3.3 U9.12
5V_BT_TX3: J4.3 U12.12
5V_BT_TX4: J5.3 U15.12
5V_BT_TX5: J6.3 U18.12
5V_BT_TX6: J7.3 U21.12
5V_BT_TX7: J8.3 U24.12
5V_BT_TX8: J9.3 U27.12
5V_BT_TX9: J10.3 U30.12
5V_BT_TX10: J11.3 U33.12
5V_BT_TX11: J12.3 U36.12
5V_BT_TX12: J13.3 U39.12
5V_BT_TX13: J14.3 U42.12
5V_BT_TX14: J15.3 U45.12
BT_CTS: U2.3 U3.5
BT_CTS1: U5.3 U6.5
BT_CTS2: U8.3 U9.5
BT_CTS3: U11.3 U12.5
BT_CTS4: U14.3 U15.5
BT_CTS5: U17.3 U18.5
BT_CTS6: U20.3 U21.5
BT_CTS7: U23.3 U24.5
BT_CTS8: U26.3 U27.5
BT_CTS9: U29.3 U30.5
BT_CTS10: U32.3 U33.5
BT_CTS11: U35.3 U36.5
BT_CTS12: U38.3 U39.5
BT_CTS13: U41.3 U42.5
BT_CTS14: U44.3 U45.5
BT_RTS: U2.1 U3.2
BT_RTS1: U5.1 U6.2
BT_RTS2: U8.1 U9.2
BT_RTS3: U11.1 U12.2
BT_RTS4: U14.1 U15.2
BT_RTS5: U17.1 U18.2
BT_RTS6: U20.1 U21.2
BT_RTS7: U23.1 U24.2
BT_RTS8: U26.1 U27.2
BT_RTS9: U29.1 U30.2
BT_RTS10: U32.1 U33.2
BT_RTS11: U35.1 U36.2
BT_RTS12: U38.1 U39.2
BT_RTS13: U41.1 U42.2
BT_RTS14: U44.1 U45.2
BT_RX: U2.4 U3.4
BT_RX1: U5.4 U6.4
BT_RX2: U8.4 U9.4
BT_RX3: U11.4 U12.4
BT_RX4: U14.4 U15.4
BT_RX5: U17.4 U18.4
BT_RX6: U20.4 U21.4
BT_RX7: U23.4 U24.4
BT_RX8: U26.4 U27.4
BT_RX9: U29.4 U30.4
BT_RX10: U32.4 U33.4
BT_RX11: U35.4 U36.4
BT_RX12: U38.4 U39.4
BT_RX13: U41.4 U42.4
BT_RX14: U44.4 U45.4
BT_TX: U2.2 U3.3
BT_TX1: U5.2 U6.3
BT_TX2: U8.2 U9.3
BT_TX3: U11.2 U12.3
BT_TX4: U14.2 U15.3
BT_TX5: U17.2 U18.3
BT_TX6: U20.2 U21.3
BT_TX7: U23.2 U24.3
BT_TX8: U26.2 U27.3
BT_TX9: U29.2 U30.3
BT_TX10: U32.2 U33.3
BT_TX11: U35.2 U36.3
BT_TX12: U38.2 U39.3
BT_TX13: U41.2 U42.3
BT_TX14: U44.2 U45.3
GND: C1.2 C2.2 C5.2 D1.C D2.C J2.6 U1.2 U2.12 U3.7
GND1: C3.2 C4.2 C6.2 D3.C D4.C J1.6 U4.2 U5.12 U6.7
GND2: C7.2 C8.2 C9.2 D5.C D6.C J3.6 U7.2 U8.12 U9.7
GND3: C10.2 C11.2 C12.2 D7.C D8.C J4.6 U10.2 U11.12 U12.7
GND4: C13.2 C14.2 C15.2 D9.C D10.C J5.6 U13.2 U14.12 U15.7
GND5: C16.2 C17.2 C18.2 D11.C D12.C J6.6 U16.2 U17.12 U18.7
GND6: C19.2 C20.2 C21.2 D13.C D14.C J7.6 U19.2 U20.12 U21.7
GND7: C22.2 C23.2 C24.2 D15.C D16.C J8.6 U22.2 U23.12 U24.7
GND8: C25.2 C26.2 C27.2 D17.C D18.C J9.6 U25.2 U26.12 U27.7
GND9: C28.2 C29.2 C30.2 D19.C D20.C J10.6 U28.2 U29.12 U30.7
GND10: C31.2 C32.2 C33.2 D21.C D22.C J11.6 U31.2 U32.12 U33.7
GND11: C34.2 C35.2 C36.2 D23.C D24.C J12.6 U34.2 U35.12 U36.7
GND12: C37.2 C38.2 C39.2 D25.C D26.C J13.6 U37.2 U38.12 U39.7
GND13: C40.2 C41.2 C42.2 D27.C D28.C J14.6 U40.2 U41.12 U42.7
GND14: C43.2 C44.2 C45.2 D29.C D30.C J15.6 U43.2 U44.12 U45.7
N$1: D4.A R2.1
N$2: D1.A R4.1
N$3: D2.A R5.1
N$4: D3.A R1.1
N$5: D6.A R6.1
N$6: D5.A R3.1
N$7: D8.A R8.1
N$8: D7.A R7.1
N$9: D10.A R10.1
N$10: D9.A R9.1
N$11: D12.A R12.1
N$12: D11.A R11.1
N$13: D14.A R14.1
N$14: D13.A R13.1
N$15: D16.A R16.1
N$16: D15.A R15.1
N$17: D18.A R18.1
N$18: D17.A R17.1
N$19: D20.A R20.1
N$20: D19.A R19.1
N$21: D22.A R22.1
N$22: D21.A R21.1
N$23: D24.A R24.1
N$24: D23.A R23.1
N$25: D26.A R26.1
N$26: D25.A R25.1
N$27: D28.A R28.1
N$28: D27.A R27.1
N$29: D30.A R30.1
N$30: D29.A R29.1
PIO1/LED: R4.2 U2.15
PIO1/LED1: R1.2 U5.15
PIO1/LED2: R3.2 U8.15
PIO1/LED3: R7.2 U11.15
PIO1/LED4: R9.2 U14.15
PIO1/LED5: R11.2 U17.15
PIO1/LED6: R13.2 U20.15
PIO1/LED7: R15.2 U23.15
PIO1/LED8: R17.2 U26.15
PIO1/LED9: R19.2 U29.15
PIO1/LED10: R21.2 U32.15
PIO1/LED11: R23.2 U35.15
PIO1/LED12: R25.2 U38.15
PIO1/LED13: R27.2 U41.15
PIO1/LED14: R29.2 U44.15